# EAGLE board MakerTherapyBadge (EAGLE 9.6.2)
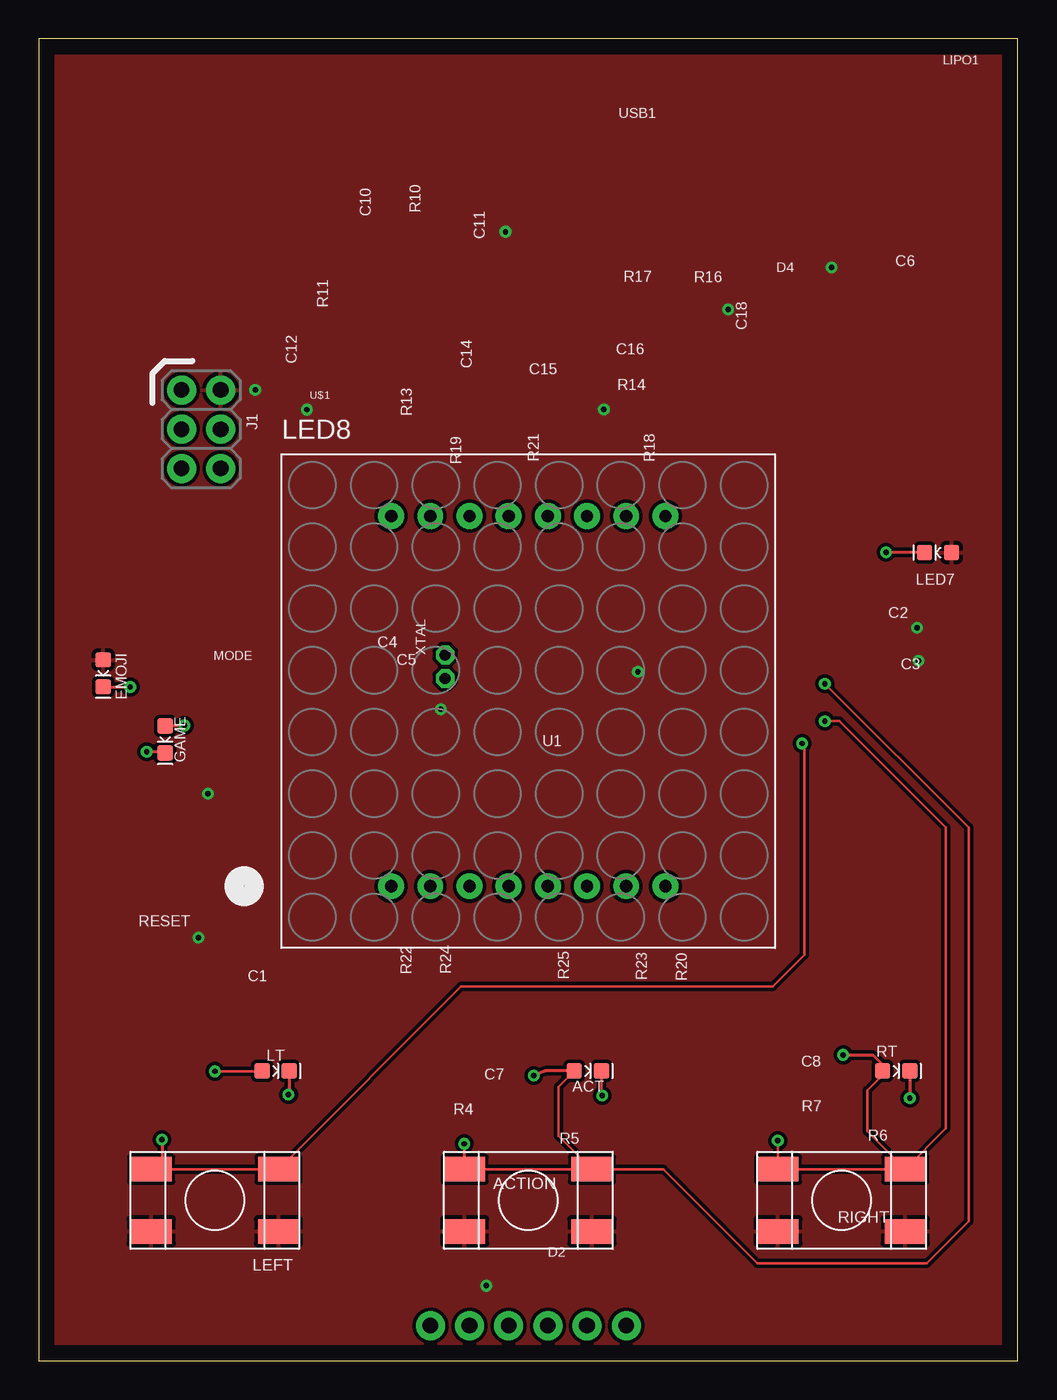
[diagram p0: board, top side]
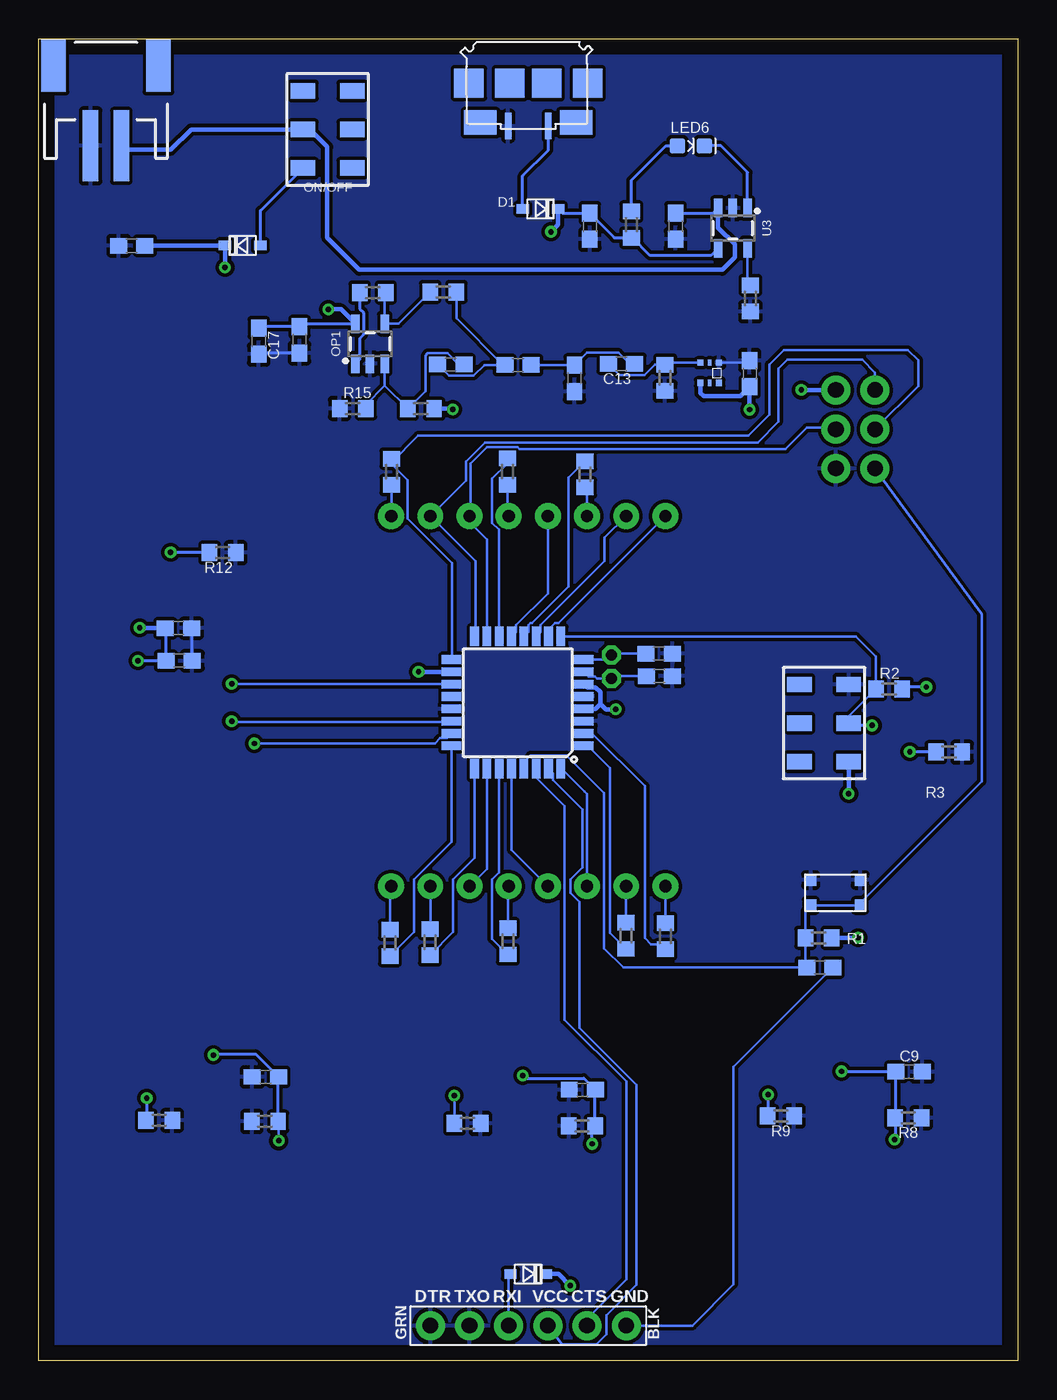
[diagram p1: board, bottom side, seen from below]

Size 63.5 x 85.72 mm. Coordinates in mm from the lower left corner, seen from the top.
Outline: 0,0 63.5,0 63.5,85.72 0,85.72 0,0
Copper layers (1*16): Top 0.035mm / dielectric 1.5mm / Bottom 0.035mm
Design rules "default": minimum track width 6mil, minimum drill 0.35mm, track to track 6mil, track to pad 6mil, pad to pad 6mil, via to via 6mil, smd to smd 6mil, copper to edge 40mil, drill to drill 6mil, minimum pad ring 10mil, minimum via ring 8mil, stop-mask expansion 4mil, vias tented up to drill 0mil, thermal gap 10mil

## Footprints (pad centres in the part's own frame; a part is rotated, then mirrored left to right if it is on the bottom)
LED-0603 = smd 1 x 1: A -0.877,0; C 0.877,0
SPST.KT11P4SM34LFS = smd 2.665 x 1.59: 1 -4.128,2.02; 2 4.128,2.02; 3 -4.128,-2.02; 4 4.128,-2.02
C0603 = smd 1.1 x 1: 1 -0.85,0; 2 0.85,0
USC = smd 0.8 x 0.6: + -1.15,0; - 1.15,0
FTDI_DEVICE = drill 1.016 pad 1.88: CTS 3.81,0; DTR -6.35,0; GND 6.35,0; RXI -1.27,0; TXO -3.81,0; VCC 1.27,0
2X3-NS = drill 1.016 pad 1.88: 1 -2.54,-1.27; 2 -2.54,1.27; 3 0,-1.27; 4 0,1.27; 5 2.54,-1.27; 6 2.54,1.27
SEGMENT_BL-M12A881UR = drill 0.8 pad 1.676: 1 -8.89,-12; 2 -6.35,-12; 3 -3.81,-12; 4 -1.27,-12; 5 1.27,-12; 6 3.81,-12; 7 6.35,-12; 8 8.89,-12; 9 8.89,12; 10 6.35,12; 11 3.81,12; 12 1.27,12; 13 -1.27,12; 14 -3.81,12; 15 -6.35,12; 16 -8.89,12
JST-2-SMD = smd 1 x 4.6: 1 -1,-3.7; 2 1,-3.7 | smd 1.6 x 3.4: NC1 -3.4,1.5; NC2 3.4,1.5
SWITCH.00 = smd 1 x 1.6: 1 -2.5,1.6; 2 0,1.6; 3 2.5,1.6; 5 -2.5,-1.6; 6 0,-1.6; 7 2.5,-1.6
SOT23-5 = smd 0.55 x 1.2: 1 -0.95,-1.3; 2 0,-1.3; 3 0.95,-1.3; 4 0.95,1.3; 5 -0.95,1.3
R0603 = smd 1 x 1.1: 1 -0.85,0; 2 0.85,0
BUTTON-GULLWING = smd 0.7 x 0.75: 1 -1.6,0.825; 2 1.6,0.825; 3 -1.6,-0.825; 4 1.6,-0.825
TQFP32-08 = smd 1.27 x 0.559: 1 -4.293,2.8; 2 -4.293,2; 3 -4.293,1.2; 4 -4.293,0.4; 5 -4.293,-0.4; 6 -4.293,-1.2; 7 -4.293,-2; 8 -4.293,-2.8; 17 4.293,-2.8; 18 4.293,-2; 19 4.293,-1.2; 20 4.293,-0.4; 21 4.293,0.4; 22 4.293,1.2; 23 4.293,2; 24 4.293,2.8 | smd 0.559 x 1.27: 9 -2.8,-4.293; 10 -2,-4.293; 11 -1.2,-4.293; 12 -0.4,-4.293; 13 0.4,-4.293; 14 1.2,-4.293; 15 2,-4.293; 16 2.8,-4.293; 25 2.8,4.293; 26 2,4.293; 27 1.2,4.293; 28 0.4,4.293; 29 -0.4,4.293; 30 -1.2,4.293; 31 -2,4.293; 32 -2.8,4.293
6-PIN.CHIPLED = smd 0.4 x 0.4: 1 0.6,0.65; 3 -0.6,0.65; 4 -0.6,-0.65; 6 0.6,-0.65 | smd 0.2 x 0.4: 2 0,0.65; 5 0,-0.65
USB-MICRO-01.BIGGERPADS.PWR = smd 0.4 x 1.7: 1 -1.3,2.775; 5 1.3,2.775 | smd 1.9 x 1.9: SOLDER-1 -3.85,0; SOLDER-2 -1.2,0; SOLDER-3 1.2,0; SOLDER-4 3.85,0 | smd 2.1 x 1.6: SOLDER-5 -3.1,2.55; SOLDER-6 3.1,2.55
CA-301 = drill 0.711 octagon: 1 0,0; 2 1.524,0

## Placement (x,y rotation side)
ACT  [LED-0603]  35.61,18.8 0 top
ACTION  [SPST.KT11P4SM34LFS]  31.75,10.41 180 top
C1  0.1u  [C0603]  12.85,25.5 0 bottom
C2  2.2u  [C0603]  54.43,47.5 0 bottom
C3  0.1u  [C0603]  54.38,45.39 0 bottom
C4  22p  [C0603]  23.27,45.85 0 bottom
C5  22p  [C0603]  23.24,44.4 0 bottom
C6  4.7u  [C0603]  57.45,72.29 180 bottom
C7  100n  [C0603]  28.24,17.58 0 bottom
C8  100n  [C0603]  48.79,18.41 0 bottom
C9  100n  [C0603]  7.06,18.75 0 bottom
C10  4.7u  [C0603]  22.2,73.56 270 bottom
C11  [C0603]  27.76,73.56 270 bottom
C12  100n  [C0603]  17.4,64.01 270 bottom
C13  4.7u  [C0603]  25.7,64.64 180 bottom
C14  4.7u  [C0603]  28.75,63.7 270 bottom
C15  4.7u  [C0603]  32.41,64.57 180 bottom
C16  2.2u  [C0603]  36.78,64.59 0 bottom
C17  100n  [C0603]  49.23,66.12 270 bottom
C18  1u  [C0603]  46.58,66.19 270 bottom
D1  1A/23V/620mV  [USC]  30.96,74.68 0 bottom
D2  [USC]  31.75,5.64 0 bottom
D4  1A/23V/620mV  [USC]  50.27,72.31 180 bottom
EMOJI  [LED-0603]  4.19,44.58 270 top
FTDI1  FTDI_DEVICE  [FTDI_DEVICE]  31.75,2.29 0 bottom
GAME  [LED-0603]  8.2,40.28 270 top
J1  AVR_SPI_PROG_3X2NS  [2X3-NS]  10.54,60.4 270 top
LED6  [LED-0603]  21.21,78.77 0 bottom
LED7  [LED-0603]  58.32,52.4 180 top
LED8  [SEGMENT_BL-M12A881UR]  31.75,42.77 0 top
LEFT  [SPST.KT11P4SM34LFS]  11.43,10.41 180 top
LIPO1  [JST-2-SMD]  59.13,82.47 0 bottom
LT  [LED-0603]  15.37,18.8 0 top
MODE  SWITCH.JS202011JXQNUPWARDS  [SWITCH.00]  12.57,41.35 270 bottom
ON/OFF  SWITCH.JS202011JXQNUPWARDS  [SWITCH.00]  44.75,79.83 90 bottom
OP1  [SOT23-5]  42.01,65.94 0 bottom
R1  10k  [R0603]  12.93,27.43 180 bottom
R2  1k  [R0603]  8.36,43.56 0 bottom
R3  1k  [R0603]  4.47,39.47 180 bottom
R4  10k  [R0603]  28.27,15.24 0 bottom
R5  1k  [R0603]  35.69,15.39 180 bottom
R6  1k  [R0603]  55.68,15.6 180 bottom
R7  10k  [R0603]  48.82,15.52 0 bottom
R8  10k  [R0603]  7.11,15.77 180 bottom
R9  1k  [R0603]  15.37,15.88 180 bottom
R10  1k  [R0603]  25.07,73.66 270 bottom
R11  10k  [R0603]  17.35,68.88 90 bottom
R12  487  [R0603]  51.56,52.4 180 bottom
R13  12k  [R0603]  22.89,63.73 90 bottom
R14  210k  [R0603]  38.71,61.72 0 bottom
R15  210k  [R0603]  43.13,61.75 0 bottom
R16  3.3M  [R0603]  41.83,69.27 0 bottom
R17  10k  [R0603]  37.26,69.29 0 bottom
R18  205  [R0603]  40.61,57.63 270 bottom
R19  205  [R0603]  28.07,57.48 270 bottom
R20  205  [R0603]  40.72,27.1 90 bottom
R21  205  [R0603]  33.1,57.66 270 bottom
R22  205  [R0603]  22.86,27.53 90 bottom
R23  205  [R0603]  38.13,27.15 90 bottom
R24  205  [R0603]  25.43,27.56 90 bottom
R25  205  [R0603]  33.07,27.2 90 bottom
RESET  [BUTTON-GULLWING]  11.84,30.35 180 bottom
RIGHT  [SPST.KT11P4SM34LFS]  52.07,10.41 180 top
RT  [LED-0603]  55.6,18.8 0 top
U1  ATMEGA328P_TQFP  [TQFP32-08]  32.44,42.67 180 bottom
U3  MCP73831.SOT23-5  [SOT23-5]  18.49,73.43 180 bottom
U$1  ADPS9008  [6-PIN.CHIPLED]  19.99,64.06 180 bottom
USB1  USB.MICRO.PWR-BIGGERPADS  [USB-MICRO-01.BIGGERPADS.PWR]  31.75,82.83 180 bottom
XTAL  [CA-301]  26.37,45.77 270 top

## Library data of the parts
ACT EMOJI GAME LED6 LED7 LT RT = LinnesLab-LED
ACTION LEFT MODE ON/OFF RESET RIGHT = LinnesLab-Switches
C1-C18 R1-R25 = LinnesLab-Passives
D1 D2 D4 = LinnesLab-DiscreteSemi
FTDI1 J1 USB1 = LinnesLab-Connectors
LED8 = adafruit
LIPO1 = LinnesLab-Connectors; PROD_ID: CONN-11443; SF_ID: PRT-08612
OP1 = LinnesLab-AnalogIC
U1 = LinnesLab-Microcontrollers; PROD_ID: IC-09069
U3 = LinnesLab-Power
U$1 = LinnesLab-Sensors
XTAL = LinnesLab-Clocks

## Nets
ACTION: ACT.A ACTION.3 ACTION.4 C7.2 R4.2 U1.19
DTR: C1.2 FTDI1.GND
GND: C2.2 C3.2 C4.2 C5.2 C6.2 C7.1 C8.1 C9.2 C10.2 C11.2 C12.1 C14.2 C17.2 C18.2 FTDI1.DTR FTDI1.TXO J1.6 LIPO1.1 MODE.1 OP1.2 R3.1 R4.1 R5.1 R6.1 R7.1 R8.1 R9.1 R11.1 R12.1 R13.1 R15.1 RESET.3 RESET.4 U1.3 U1.5 U1.21 U3.2 U$1.4 USB1.5
LD1: R22.1 U1.2
LD2: R24.1 U1.1
LD3: LED8.3 U1.32
LD4: LED8.4 U1.28
LD5: R25.1 U1.27
LD6: LED8.6 U1.26
LD7: R23.1 U1.25
LD8: R20.1 U1.24
LD9: J1.3 R18.1 U1.17
LD10: J1.1 LED8.10 U1.16
LD11: J1.4 LED8.11 U1.15
LD12: R21.1 U1.14
LD13: LED8.13 U1.13
LD14: R19.1 U1.12
LD15: LED8.15 U1.11
LD16: LED8.16 U1.10
LEFT: C9.1 LEFT.3 LEFT.4 LT.A R8.2 U1.23
MODE: GAME.A MODE.2 R2.1 U1.9
N$1: LED8.9 R18.2
N$2: D2.+ FTDI1.RXI
N$3: LED8.14 R19.2
N$4: LED8.8 R20.2
N$5: LED8.12 R21.2
N$6: C4.1 U1.8 XTAL.1
N$7: D4.+ ON/OFF.1
N$8: EMOJI.C R2.2
N$9: C5.1 U1.7 XTAL.2
N$10: LT.C R9.2
N$11: LED8.1 R22.2
N$12: LED8.7 R23.2
N$13: LED8.2 R24.2
N$14: GAME.C R3.2
N$17: ACT.C R5.2
N$18: R6.2 RT.C
N$20: D1.+ USB1.1
N$21: LED6.A R10.1
N$22: LED8.5 R25.2
N$23: LED7.C R12.2
N$24: R11.2 U3.5
N$25: OP1.4 R16.2 R17.1
N$27: C16.2 OP1.3 R14.1 R15.2
N$28: C13.2 R13.2 U$1.6
N$30: C13.1 C14.1 C15.1
N$31: C15.2 C16.1 R17.2
PULSE: OP1.1 R16.1
RESET: C1.1 J1.5 R1.2 RESET.1 RESET.2 U1.29
RIGHT: C8.2 R7.2 RIGHT.3 RIGHT.4 RT.A U1.22
RXD: FTDI1.CTS U1.30
STAT: LED6.C U3.1
TXD: FTDI1.VCC U1.31
VCC: ACTION.1 ACTION.2 C2.1 C3.1 C6.1 C11.1 C12.2 C17.1 C18.1 D1.- D2.- D4.- EMOJI.A J1.2 LED7.A LEFT.1 LEFT.2 MODE.3 OP1.5 R1.1 R10.2 R14.2 RIGHT.1 RIGHT.2 U1.4 U1.6 U1.18 U3.4 U$1.1
VLIPO: C10.1 LIPO1.2 ON/OFF.2 U3.3

## Tracks (layer width: path | path; a pad name or v marks a point on that pad's centre or on a via)
ACTION  (via drill 0.35)
  Top 0.152: ACTION.3 ACTION.4 | ACTION.3 33.71,14.61 33.71,17.77 ACT.A | ACTION.3 40.5,12.43 46.61,6.33 57.58,6.33 60.3,9.04 60.3,34.57 v50.98,43.89
  Top 0.203: ACTION.4 27.62,14.06 v27.61,14.07 | ACT.A 32.84,18.8 v32.11,18.49 | v32.11,18.49
  Bottom 0.152: v50.98,43.89 50.96,43.87 U1.19
  Bottom 0.203: v27.61,14.07 27.61,15.05 R4.2 27.42,17.55 C7.2 28.15,18.33 31.95,18.33 v32.11,18.49
DTR
  Bottom 0.152: C1.2 18.44,19.06 18.44,4.95 21.11,2.29 FTDI1.GND
GND
  Bottom 0.152: U$1.4 17.55,64.71 C12.1
  Bottom 0.203: C3.2 53.53,47.45 C2.2 | C18.2 49.15,65.34 C17.2
  pour Bottom (isolate 0.229): 63.2,85.57 63.2,-0.46 0.41,-0.46 0.41,85.62
LD1
  Bottom 0.152: R22.1 23.19,27.01 23.8,27.01 24.2,27.41 24.2,37.27 27.6,40.67 U1.2
LD2
  Bottom 0.152: U1.1 28.09,39.82 27.86,39.82 26.47,38.43 26.47,27.75 R24.1
LD3
  Bottom 0.152: LED8.3 27.94,36.75 28.12,36.93 29.57,38.38 U1.32
LD4
  Bottom 0.152: U1.28 32.84,33.13 LED8.4
LD5
  Bottom 0.152: U1.27 33.64,31.67 34.09,31.21 34.09,27.37 R25.1
LD6
  Bottom 0.152: U1.26 34.44,31.9 LED8.6
LD7
  Bottom 0.152: U1.25 35.24,32.61 36.63,31.21 36.63,27.8 R23.1
LD8
  Bottom 0.152: R20.1 39.17,27.8 39.17,31.21 36.73,33.65 U1.24
LD9
  Bottom 0.152: R18.1 40.62,58.24 | 40.62,58.24 40.62,58.16 39.57,57.11 39.57,54.61 36.7,51.74 36.7,45.5 U1.17 | 40.62,58.24 38.88,59.97 17.47,59.97 16.1,61.34 16.1,64.59 15.16,65.53 7.14,65.53 6.48,64.87 6.48,63.2 J1.3
LD10
  Bottom 0.152: LED8.10 | LED8.10 35.18,51.85 35.18,47.02 U1.16 | LED8.10 35.79,57.07 35.79,58.29 34.54,59.54 16.86,59.54 15.52,60.88 15.52,64.31 14.94,64.9 10.08,64.9 9.27,64.08 J1.1
LD11
  Bottom 0.152: LED8.11 35.56,54.38 35.48,54.3 | U1.15 34.44,53.26 35.48,54.3 | 35.48,54.3 35.48,58.17 34.42,59.23 33.74,59.23 33.74,59.24 32.45,59.24 32.32,59.11 15.09,59.11 13.69,60.5 11.91,60.5 J1.4
LD12
  Bottom 0.152: R21.1 33.1,58.18 34.09,57.19 34.09,54.33 33.64,53.88 U1.14
LD13
  Bottom 0.152: U1.13 32.54,47.26 32.54,47.69 30.48,49.76 LED8.13
LD14
  Bottom 0.152: R19.1 29.13,57.26 29.13,50.22 31.52,47.83 31.61,47.83 31.74,47.69 31.74,47.26 U1.12
LD15
  Bottom 0.152: LED8.15 26.8,53.38 26.8,51.84 30.94,47.69 30.94,47.26 U1.11
LD16
  Bottom 0.152: LED8.16 29.8,47.83 30.01,47.83 30.44,47.4 U1.10
LEFT  (via drill 0.35)
  Top 0.152: LEFT.4 7.92,12.43 LEFT.3 27.41,24.28 47.62,24.28 49.66,26.31 49.66,40.03 v49.51,40.03
  Top 0.203: v11.43,18.77 LT.A | v8,14.35 8,12.51 7.92,12.43
  Bottom 0.152: U1.23 37.02,40.38 37.46,40.38 37.81,40.03 v49.51,40.03
  Bottom 0.203: v11.43,18.77 11.4,18.75 C9.1 7.91,15.82 R8.2 7.96,14.39 v8,14.35
MODE  (via drill 0.35)
  Top 0.203: GAME.A 8.2,41.2 v9.45,41.2
  Bottom 0.152: MODE.2 10.97,41.8 R2.1 9.21,45.66 10.52,46.97 U1.9
  Bottom 0.203: v9.45,41.2 10.97,41.2 MODE.2
N$1
  Bottom 0.152: R18.2 40.62,54.8 LED8.9
N$2
  Bottom 0.152: FTDI1.RXI 33.02,5.52 D2.+
N$3
  Bottom 0.152: LED8.14 27.94,56.5 R19.2
N$4
  Bottom 0.152: R20.2 40.72,30.77 LED8.8
N$5
  Bottom 0.152: R21.2 33.1,54.85 LED8.12
N$6
  Bottom 0.152: C4.1 26.29,45.85 XTAL.1 26.66,45.47 U1.8
N$7
  Bottom 0.203: ON/OFF.1 49.12,74.57 D4.+
N$8  (via drill 0.35)
  Top 0.203: EMOJI.C v5.94,43.7 v5.94,43.69
  Bottom 0.203: v5.94,43.69 7.51,43.69 R2.2
N$9
  Bottom 0.152: C5.1 26.21,44.4 XTAL.2 27.28,44.25 27.41,44.38 27.85,44.38 U1.7
N$10  (via drill 0.35)
  Top 0.203: LT.C 16.24,17.31 v16.2,17.27
  Bottom 0.203: v16.2,17.27 16.2,15.89 R9.2
N$11
  Bottom 0.152: R22.2 LED8.1
N$12
  Bottom 0.152: R23.2 38.1,28.04 LED8.7
N$13
  Bottom 0.152: R24.2 25.43,30.77 LED8.2
N$14  (via drill 0.35)
  Top 0.203: v7.01,39.5 8.2,39.5 GAME.C
  Bottom 0.203: R3.2 5.37,39.52 6.99,39.52 v7.01,39.5
N$17  (via drill 0.35)
  Top 0.152: v36.55,17.2 36.49,17.26 ACT.C
  Bottom 0.152: R5.2 36.54,17.18 v36.55,17.2
N$18  (via drill 0.35)
  Top 0.203: RT.C 56.48,17.05 v56.49,17.04
  Bottom 0.203: v56.49,17.04 56.49,15.63 R6.2
N$20
  Bottom 0.203: D1.+ 32.11,76.83 30.45,78.49 USB1.1
N$21
  Bottom 0.203: LED6.A 22.84,78.77 25.07,76.53 R10.1
N$22
  Bottom 0.152: R25.2 33.07,30.77 LED8.5
N$23  (via drill 0.35)
  Top 0.203: v54.94,52.43 57.44,52.43 LED7.C
  Bottom 0.203: R12.2 54.94,52.4 v54.94,52.43
N$24
  Bottom 0.152: U3.5 17.54,69.93 R11.2
N$25
  Bottom 0.152: R17.1 40.16,67.24 OP1.4 41.06,69.19 R16.2
N$27
  Bottom 0.152: C16.2 36.26,64.59 36.98,65.32 38.27,65.32 38.41,65.19 38.41,62.87 R14.1 41.06,63.22 | 41.06,63.22 OP1.3 | R15.2 42.28,62.01 41.06,63.22
N$28
  Bottom 0.152: C13.2 25.83,63.91 24.21,63.91 23.55,64.58 R13.2 22.75,64.71 U$1.6
N$30
  Bottom 0.152: C13.1 25.18,64.64 25.91,65.37 27.93,65.37 C14.1 31.55,64.55 C15.1
N$31
  Bottom 0.152: C15.2 33.38,64.57 | 33.38,64.57 34.58,64.57 35.28,63.86 36.9,63.86 C16.1 | R17.2 36.41,67.6 33.38,64.57
PULSE
  Bottom 0.203: OP1.1 42.68,64.92 42.68,66.28 42.43,66.53 42.43,67.94 42.68,68.19 R16.1
RESET
  Bottom 0.152: 10.39,29.53 RESET.2 13.78,29.19 R1.2 13.78,25.58 C1.1 25.59,25.5 26.85,26.76 26.85,36.83 29.26,39.24 31.61,39.24 32.04,38.82 U1.29 | 10.39,29.53 RESET.1 | J1.5 2.36,48.41 2.36,37.55 10.39,29.53
RIGHT  (via drill 0.35)
  Top 0.152: RIGHT.3 53.75,14.88 53.75,17.55 54.51,18.31 RT.A | RIGHT.3 RIGHT.4 47.93,12.45 v47.93,14.28 | RIGHT.3 58.83,15.06 58.83,34.57 51.92,41.48 v50.98,41.48
  Top 0.203: RT.A 54.72,19.19 54.08,19.84 v52.17,19.84
  Bottom 0.152: v47.93,14.28 47.93,15.48 R7.2 | U1.22 36.77,41.43 50.93,41.43 v50.98,41.48
  Bottom 0.203: R7.2 47.97,18.39 C8.2 49.39,19.86 52.17,19.86 v52.17,19.84
RXD
  Bottom 0.152: U1.30 31.24,37.81 29.39,35.97 29.39,22.12 25.38,18.11 25.38,5.28 27.94,2.72 FTDI1.CTS
STAT
  Bottom 0.203: LED6.C 19.25,78.77 17.54,77.05 U3.1
TXD
  Bottom 0.152: U1.31 30.14,38.09 30.14,37.65 28.25,35.75 28.25,31.98 29.01,31.21 29.01,30.33 28.42,29.75 28.42,21.59 24.74,17.91 24.74,4.93 26.7,2.97 26.7,1.73 27.33,1.09 29.57,1.09 FTDI1.VCC
VCC  (via drill 0.35)
  Bottom 0.203: v57.05,45.39 C3.1 55.23,47.45 C2.1 | C18.1 47.12,67.04 | 47.12,67.04 49.15,67.04 C17.1 | OP1.5 46.92,67.24 47.12,67.04 | D1.- 29.55,74.41 C11.1 26.16,72.81 R10.2 25.01,72.81 23.85,71.65 19.92,71.65 U3.4 | 56.58,72.31 C6.1
  Bottom 0.305: OP1.5 43.9,68.17 v44.7,68.17 | R14.2 36.68,61.72 v36.65,61.7 | v51.41,70.89 v51.42,70.9 D4.- 56.58,72.31 | v30.28,73.2 29.81,73.67 D1.- | C2.1 55.31,47.52 v56.95,47.52 | MODE.3 v10.97,36.78 | v10.97,36.78 | D2.- 29.79,5.64 v29.03,4.88 | R1.1 v10.36,27.43 | U1.18 v38.85,44.67 v38.86,44.68 | U1.6 27.93,43.66 27.38,43.66 27.08,43.36 27.08,42.6 | 27.08,42.6 27.4,42.27 U1.4 | 27.08,42.6 26.72,42.24 v26.09,42.24 | U$1.1 20.59,62.75 20.37,62.53 18.01,62.53 17.4,63.14 C12.2 v17.4,61.67 | J1.2 v14.05,62.94
  pour Top (isolate 0.229): 63.68,85.29 63.68,0.08 0.23,0.08 0.36,85.29
VLIPO
  Bottom 0.203: C10.1 19.76,74.41 U3.3
  Bottom 0.305: U3.3 19.44,73.47 18.36,72.39 18.36,71.55 19.18,70.74 42.71,70.74 44.78,72.81 44.78,78.72 45.9,79.83 ON/OFF.2 53.62,79.83 54.94,78.51 57.87,78.51 LIPO1.2